# EAGLE board 8Bit Register_Left (EAGLE 9.6.1)
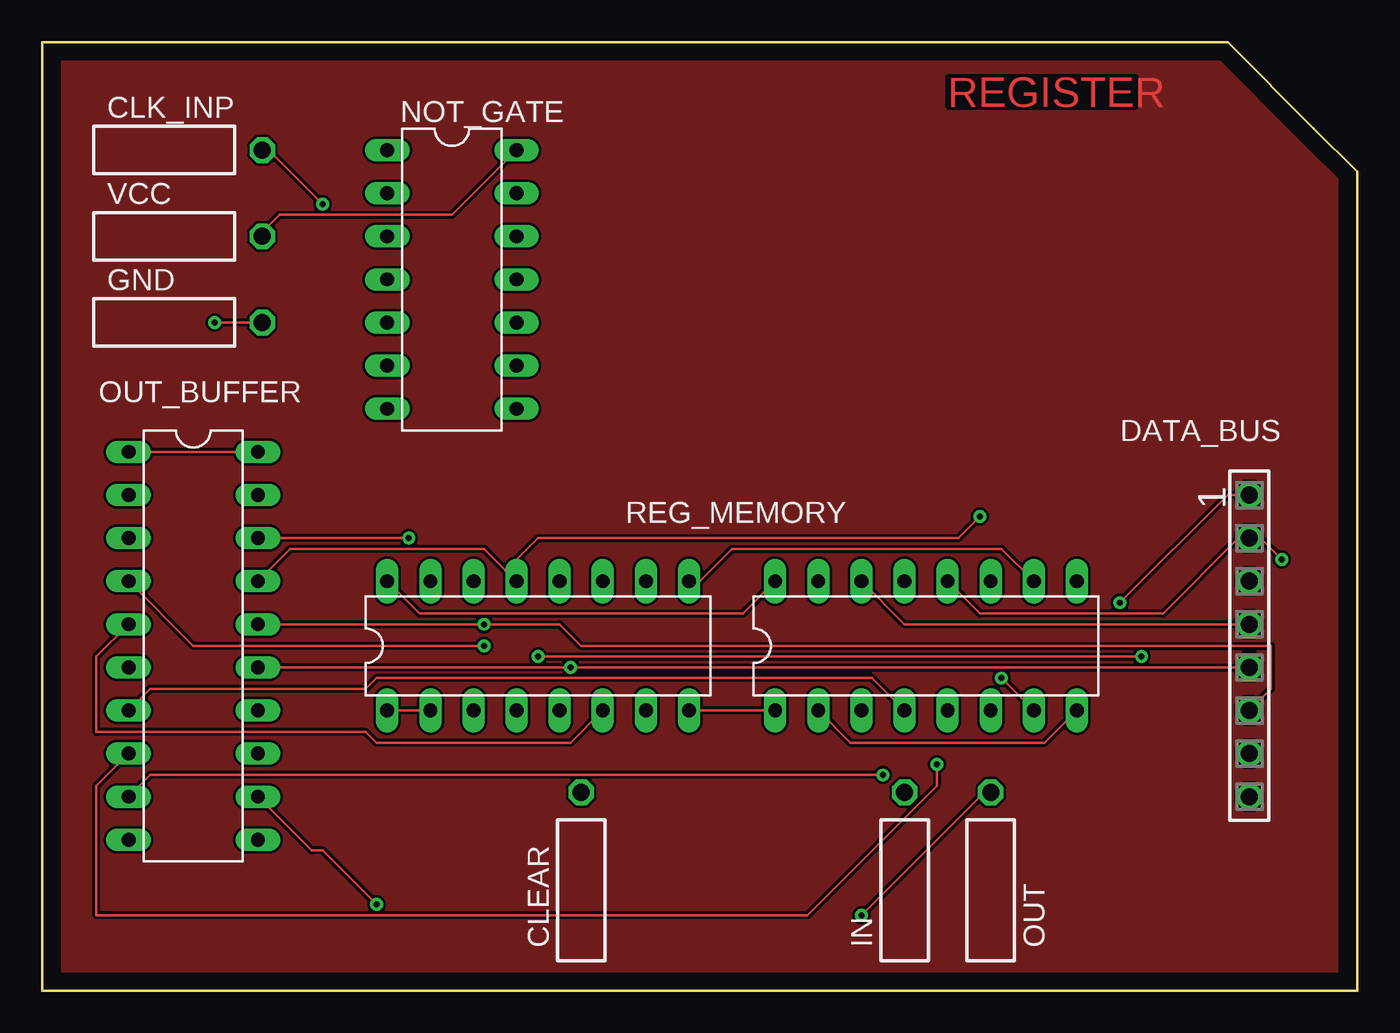
[diagram p0: board, top side]
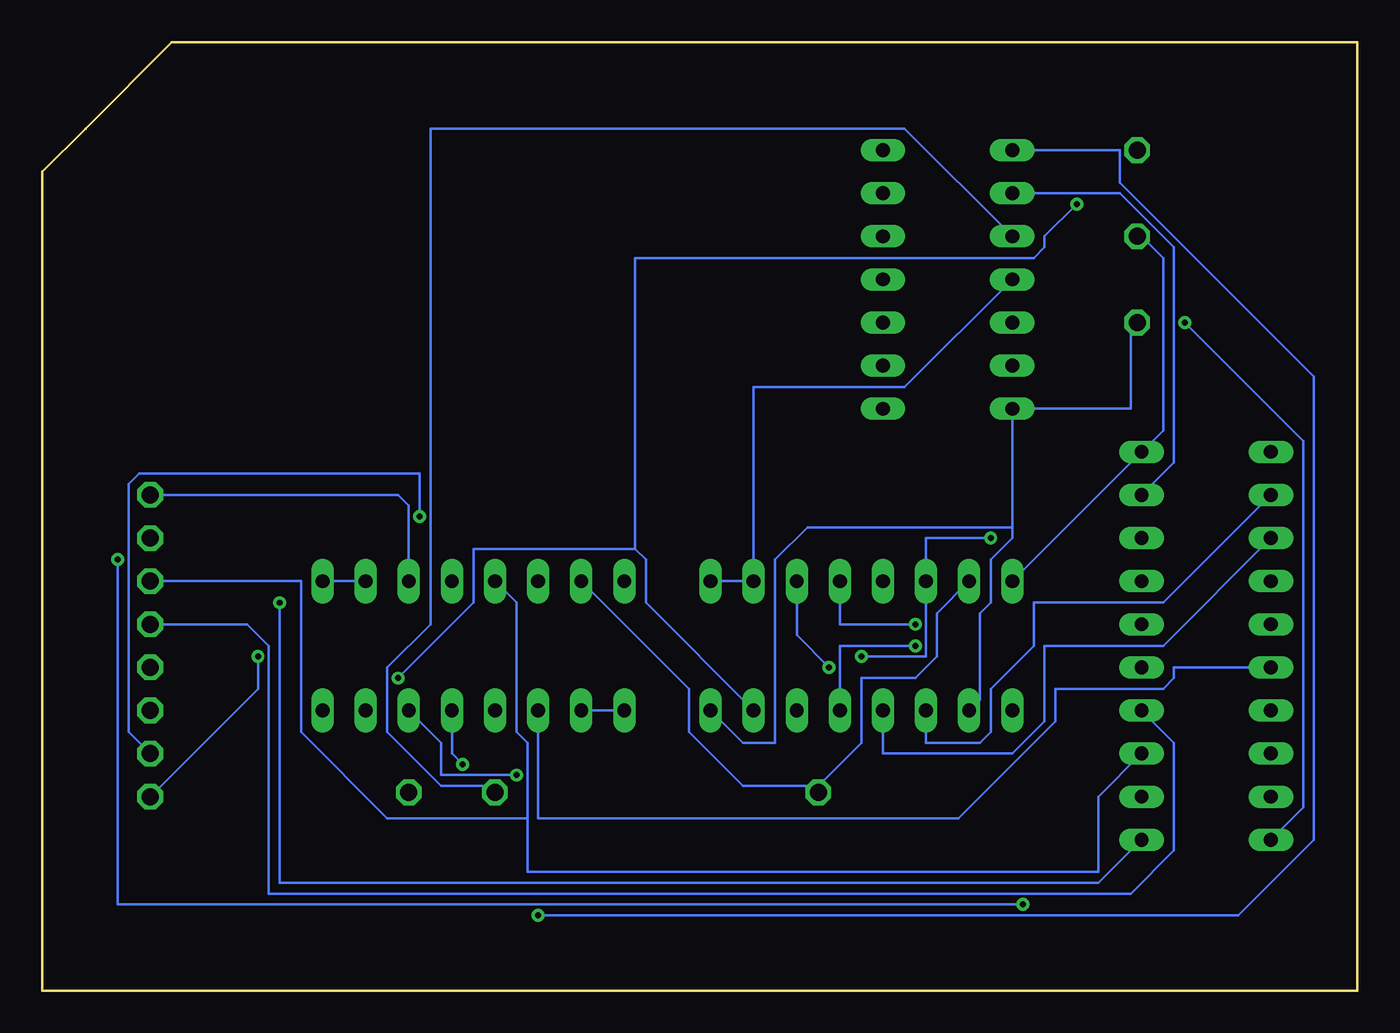
[diagram p1: board, bottom side, seen from below]

Size 77.47 x 55.88 mm. Coordinates in mm from the lower left corner, seen from the top.
Outline: 69.85,55.88 0,55.88 0,0 77.47,0 77.47,48.26 74.93,50.8 69.85,55.88
Copper layers (1*16): Top 0.035mm / dielectric 1.5mm / Bottom 0.035mm
Design rules "default": minimum track width 6mil, minimum drill 0.35mm, track to track 6mil, track to pad 6mil, pad to pad 6mil, via to via 6mil, smd to smd 6mil, copper to edge 40mil, drill to drill 6mil, minimum pad ring 10mil, minimum via ring 8mil, stop-mask expansion 4mil, vias tented up to drill 0mil, thermal gap 10mil

## Footprints (pad centres in the part's own frame; a part is rotated, then mirrored left to right if it is on the bottom)
SSW-101-02-G-S-RA = drill 1 pad 1.5 octagon: 1 0,1.524
SSW-108-02-G-S = drill 1 pad 1.5 octagon: 1 -8.89,0; 2 -6.35,0; 3 -3.81,0; 4 -1.27,0; 5 1.27,0; 6 3.81,0; 7 6.35,0; 8 8.89,0
DIL14 = drill 0.813 long: 1 -7.62,-3.81; 2 -5.08,-3.81; 3 -2.54,-3.81; 4 0,-3.81; 5 2.54,-3.81; 6 5.08,-3.81; 7 7.62,-3.81; 8 7.62,3.81; 9 5.08,3.81; 10 2.54,3.81; 11 0,3.81; 12 -2.54,3.81; 13 -5.08,3.81; 14 -7.62,3.81
DIL20 = drill 0.813 long: 1 -11.43,-3.81; 2 -8.89,-3.81; 3 -6.35,-3.81; 4 -3.81,-3.81; 5 -1.27,-3.81; 6 1.27,-3.81; 7 3.81,-3.81; 8 6.35,-3.81; 9 8.89,-3.81; 10 11.43,-3.81; 11 11.43,3.81; 12 8.89,3.81; 13 6.35,3.81; 14 3.81,3.81; 15 1.27,3.81; 16 -1.27,3.81; 17 -3.81,3.81; 18 -6.35,3.81; 19 -8.89,3.81; 20 -11.43,3.81
DIL16 = drill 0.813 long: 1 -8.89,-3.81; 2 -6.35,-3.81; 3 -3.81,-3.81; 4 -1.27,-3.81; 5 1.27,-3.81; 6 3.81,-3.81; 7 6.35,-3.81; 8 8.89,-3.81; 9 8.89,3.81; 10 6.35,3.81; 11 3.81,3.81; 12 1.27,3.81; 13 -1.27,3.81; 14 -3.81,3.81; 15 -6.35,3.81; 16 -8.89,3.81

## Placement (x,y rotation side)
CLEAR  SSW-101-02-G-S-RA  [SSW-101-02-G-S-RA]  31.75,10.16 0 top
CLK_INP  SSW-101-02-G-S-RA  [SSW-101-02-G-S-RA]  11.43,49.53 270 top
DATA_BUS  SSW-108-02-G-S  [SSW-108-02-G-S]  71.12,20.32 270 top
GND  SSW-101-02-G-S-RA  [SSW-101-02-G-S-RA]  11.43,39.37 270 top
IN  SSW-101-02-G-S-RA  [SSW-101-02-G-S-RA]  50.8,10.16 0 top
NOT_GATE  74LS04N  [DIL14]  24.13,41.91 270 top
OUT  SSW-101-02-G-S-RA  [SSW-101-02-G-S-RA]  55.88,10.16 0 top
OUT_BUFFER  74LS245N  [DIL20]  8.89,20.32 270 top
REG_MEMORY  74LS173N  [DIL16]  29.21,20.32 0 top
REG_MEMORY1  74LS173N  [DIL16]  52.07,20.32 0 top
VCC  SSW-101-02-G-S-RA  [SSW-101-02-G-S-RA]  11.43,44.45 270 top

## Library data of the parts
CLEAR CLK_INP GND IN OUT VCC = con-samtec; MF: Samtec Inc.; MPN: SSW-101-02-G-S-RA; OC_FARNELL: unknown; OC_NEWARK: 11P9337
DATA_BUS = con-samtec; MF: Samtec Inc.; MPN: SSW-108-02-G-S; OC_FARNELL: unknown; OC_NEWARK: 11P9448
NOT_GATE OUT_BUFFER REG_MEMORY REG_MEMORY1 = 74xx-eu

## Nets
GND: GND.1 NOT_GATE.7 OUT_BUFFER.10 REG_MEMORY1.1 REG_MEMORY1.2 REG_MEMORY1.8 REG_MEMORY.1 REG_MEMORY.2 REG_MEMORY.8
N$1: CLK_INP.1 REG_MEMORY1.7 REG_MEMORY.7
N$2: NOT_GATE.1 OUT.1
N$3: CLEAR.1 REG_MEMORY1.15 REG_MEMORY.15
N$4: OUT_BUFFER.2 REG_MEMORY.3
N$5: OUT_BUFFER.3 REG_MEMORY.4
N$6: OUT_BUFFER.4 REG_MEMORY.5
N$7: OUT_BUFFER.5 REG_MEMORY.6
N$8: OUT_BUFFER.6 REG_MEMORY1.3
N$9: OUT_BUFFER.7 REG_MEMORY1.4
N$10: OUT_BUFFER.8 REG_MEMORY1.5
N$11: OUT_BUFFER.9 REG_MEMORY1.6
N$12: NOT_GATE.2 OUT_BUFFER.19
N$13: DATA_BUS.8 OUT_BUFFER.18 REG_MEMORY.14
N$14: DATA_BUS.7 OUT_BUFFER.17 REG_MEMORY.13
N$15: NOT_GATE.4 REG_MEMORY1.9 REG_MEMORY1.10 REG_MEMORY.9 REG_MEMORY.10
N$16: DATA_BUS.6 OUT_BUFFER.16 REG_MEMORY.12
N$17: DATA_BUS.5 OUT_BUFFER.15 REG_MEMORY.11
N$18: DATA_BUS.1 OUT_BUFFER.11 REG_MEMORY1.11
N$19: DATA_BUS.2 OUT_BUFFER.12 REG_MEMORY1.12
N$20: DATA_BUS.3 OUT_BUFFER.13 REG_MEMORY1.13
N$21: DATA_BUS.4 OUT_BUFFER.14 REG_MEMORY1.14
N$22: IN.1 NOT_GATE.3
VCC: NOT_GATE.14 OUT_BUFFER.1 OUT_BUFFER.20 REG_MEMORY1.16 REG_MEMORY.16 VCC.1

## Tracks (layer width: path | path; a pad name or v marks a point on that pad's centre or on a via)
GND  (via drill 0.35)
  Top 0.152: REG_MEMORY1.1 REG_MEMORY.8 | REG_MEMORY1.8 59.05,14.61 47.62,14.61 REG_MEMORY1.2 | REG_MEMORY.2 REG_MEMORY.1 | GND.1 v10.16,39.37
  Bottom 0.152: REG_MEMORY1.1 REG_MEMORY1.2 | OUT_BUFFER.10 3.17,10.79 3.17,32.38 v10.16,39.37 | GND.1 13.34,39.37 13.34,34.29 NOT_GATE.7 20.32,27.3 | REG_MEMORY.2 22.23,17.14 22.23,22.23 21.59,22.86 21.59,25.4 20.32,26.67 20.32,27.3 | REG_MEMORY.8 36.2,14.61 34.29,14.61 34.29,25.4 32.38,27.3 20.32,27.3
MAIN
  pour Top: 0,55.88 69.85,55.88 77.47,48.26 77.47,0 0,0
N$1  (via drill 0.35)
  Top 0.152: REG_MEMORY1.7 v56.52,18.41 | v16.51,46.35 13.34,49.53 CLK_INP.1
  Bottom 0.152: REG_MEMORY.7 41.91,22.86 41.91,25.4 42.55,26.04 | 42.55,26.04 52.07,26.04 52.07,22.86 v56.52,18.41 | v16.51,46.35 18.41,44.45 18.41,43.81 19.05,43.18 42.55,43.18 42.55,26.04
N$2  (via drill 0.35)
  Top 0.152: v48.26,4.45 55.24,11.43 55.88,11.43 OUT.1
  Bottom 0.152: NOT_GATE.1 13.97,49.53 13.97,47.62 2.54,36.2 2.54,8.89 6.99,4.45 v48.26,4.45
N$3
  Bottom 0.152: REG_MEMORY.15 24.77,22.23 24.77,19.68 26.04,18.41 29.21,18.41 29.21,14.61 31.75,12.07 | REG_MEMORY1.15 39.37,17.78 39.37,15.24 36.2,12.07 31.75,12.07 | 31.75,12.07 CLEAR.1
N$4
  Bottom 0.152: OUT_BUFFER.2 11.43,22.86 19.05,22.86 19.05,20.32 21.59,17.78 21.59,15.24 22.23,14.61 25.4,14.61 REG_MEMORY.3
N$5
  Bottom 0.152: OUT_BUFFER.3 11.43,20.32 18.41,20.32 18.41,15.88 20.32,13.97 27.94,13.97 REG_MEMORY.4
N$6  (via drill 0.35)
  Top 0.152: OUT_BUFFER.4 8.89,20.32 v26.04,20.32
  Bottom 0.152: v26.04,20.32 30.48,20.32 REG_MEMORY.5
N$7
  Top 0.152: OUT_BUFFER.5 3.17,19.68 3.17,15.24 19.05,15.24 19.68,14.61 31.11,14.61 REG_MEMORY.6
N$8
  Bottom 0.152: OUT_BUFFER.6 10.79,19.05 10.79,18.41 11.43,17.78 17.78,17.78 17.78,15.88 23.5,10.16 48.26,10.16 REG_MEMORY1.3
N$9
  Top 0.152: OUT_BUFFER.7 6.35,17.78 19.05,17.78 19.68,18.41 48.9,18.41 REG_MEMORY1.4
N$10  (via drill 0.35)
  Top 0.152: OUT_BUFFER.8 3.17,12.07 3.17,4.45 45.09,4.45 52.7,12.07 v52.7,13.34
  Bottom 0.152: v52.7,13.34 53.34,13.97 REG_MEMORY1.5
N$11  (via drill 0.35)
  Top 0.152: OUT_BUFFER.9 6.35,12.7 v49.53,12.7
  Bottom 0.152: v49.53,12.7 53.98,12.7 53.98,14.61 REG_MEMORY1.6
N$12
  Bottom 0.152: OUT_BUFFER.19 10.79,31.11 10.79,43.81 13.97,46.99 NOT_GATE.2
N$13  (via drill 0.35)
  Top 0.152: v21.59,26.67 OUT_BUFFER.18 | v29.21,19.68 v64.77,19.68
  Bottom 0.152: v21.59,26.67 25.4,26.67 REG_MEMORY.14 25.4,19.68 v29.21,19.68 | DATA_BUS.8 64.77,17.78 v64.77,19.68
N$14  (via drill 0.35)
  Top 0.152: OUT_BUFFER.17 14.61,26.04 26.04,26.04 27.3,24.77 | v55.24,27.94 53.98,26.67 29.21,26.67 27.3,24.77 | 27.3,24.77 REG_MEMORY.13
  Bottom 0.152: DATA_BUS.7 72.39,15.24 72.39,29.84 71.75,30.48 55.24,30.48 v55.24,27.94
N$15
  Top 0.152: REG_MEMORY1.10 56.52,26.04 40.64,26.04 38.73,24.13 REG_MEMORY.9
  Bottom 0.152: REG_MEMORY1.9 REG_MEMORY1.10 | REG_MEMORY.9 REG_MEMORY.10 35.56,35.56 26.67,35.56 NOT_GATE.4
N$16  (via drill 0.35)
  Top 0.152: OUT_BUFFER.16 v26.04,21.59 30.48,21.59 31.75,20.32 72.39,20.32 72.39,17.78 DATA_BUS.6
  Bottom 0.152: v26.04,21.59 30.48,21.59 REG_MEMORY.12
N$17  (via drill 0.35)
  Top 0.152: OUT_BUFFER.15 v31.11,19.05 DATA_BUS.5
  Bottom 0.152: v31.11,19.05 33.02,20.96 REG_MEMORY.11
N$18  (via drill 0.35)
  Top 0.152: v63.5,22.86 69.85,29.21 DATA_BUS.1
  Bottom 0.152: OUT_BUFFER.11 15.24,6.35 63.5,6.35 v63.5,22.86 | REG_MEMORY1.11 55.88,28.57 56.52,29.21 DATA_BUS.1
N$19  (via drill 0.35)
  Top 0.152: OUT_BUFFER.12 15.88,8.26 16.51,8.26 v19.68,5.08 | v73.03,25.4 71.75,26.67 DATA_BUS.2 70.48,26.67 66.04,22.23 55.24,22.23 REG_MEMORY1.12
  Bottom 0.152: v19.68,5.08 73.03,5.08 v73.03,25.4
N$20
  Bottom 0.152: OUT_BUFFER.13 15.24,11.43 15.24,6.99 48.9,6.99 48.9,10.16 | 48.9,10.16 48.9,14.61 49.53,15.24 49.53,22.86 REG_MEMORY1.13 | DATA_BUS.3 62.23,24.13 62.23,15.24 57.15,10.16 48.9,10.16
N$21
  Top 0.152: REG_MEMORY1.14 50.8,21.59 DATA_BUS.4
  Bottom 0.152: OUT_BUFFER.14 10.79,14.61 10.79,8.26 13.34,5.71 64.14,5.71 64.14,20.32 65.41,21.59 DATA_BUS.4
N$22
  Bottom 0.152: NOT_GATE.3 26.67,50.8 54.61,50.8 54.61,21.59 57.15,19.05 57.15,15.24 53.98,12.07 50.8,12.07 IN.1
VCC
  Top 0.152: NOT_GATE.14 24.13,45.72 13.97,45.72 12.7,44.45 VCC.1 | REG_MEMORY1.16 41.27,22.23 22.23,22.23 REG_MEMORY.16 | OUT_BUFFER.20 OUT_BUFFER.1
  Bottom 0.152: REG_MEMORY.16 OUT_BUFFER.20 11.43,33.02 11.43,43.18 12.7,44.45 VCC.1

## Text on the board
Top: REGISTER